# Altium PCB out_board.PcbDoc
Units mm, origin at the board's own origin, x right, y up, seen from the top; angles counter-clockwise.
Board outline 148.2 x 182.42 mm, 2 copper layers (Top Layer, Bottom Layer); 63 components, 124 nets, 454 pads, 33 vias.
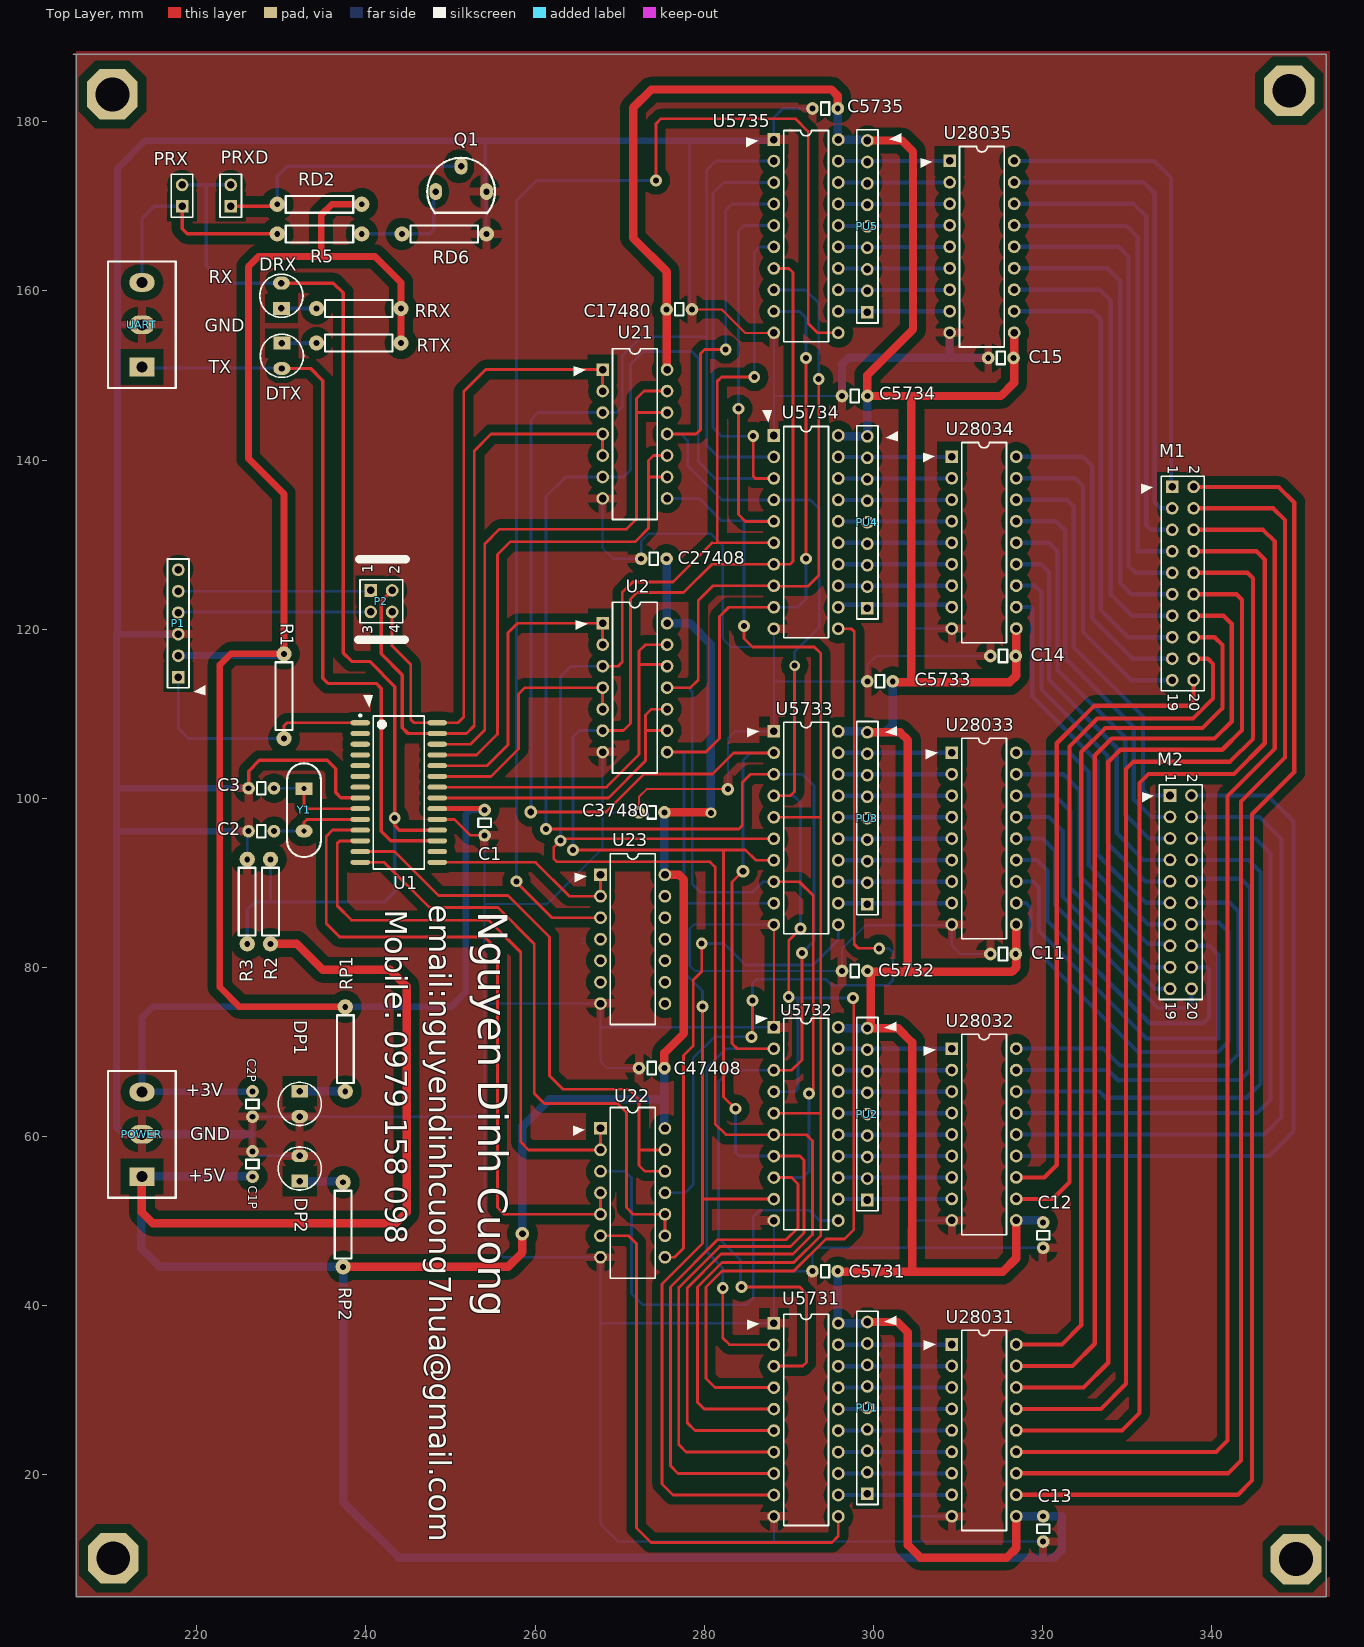
[diagram p0: Top Layer view]
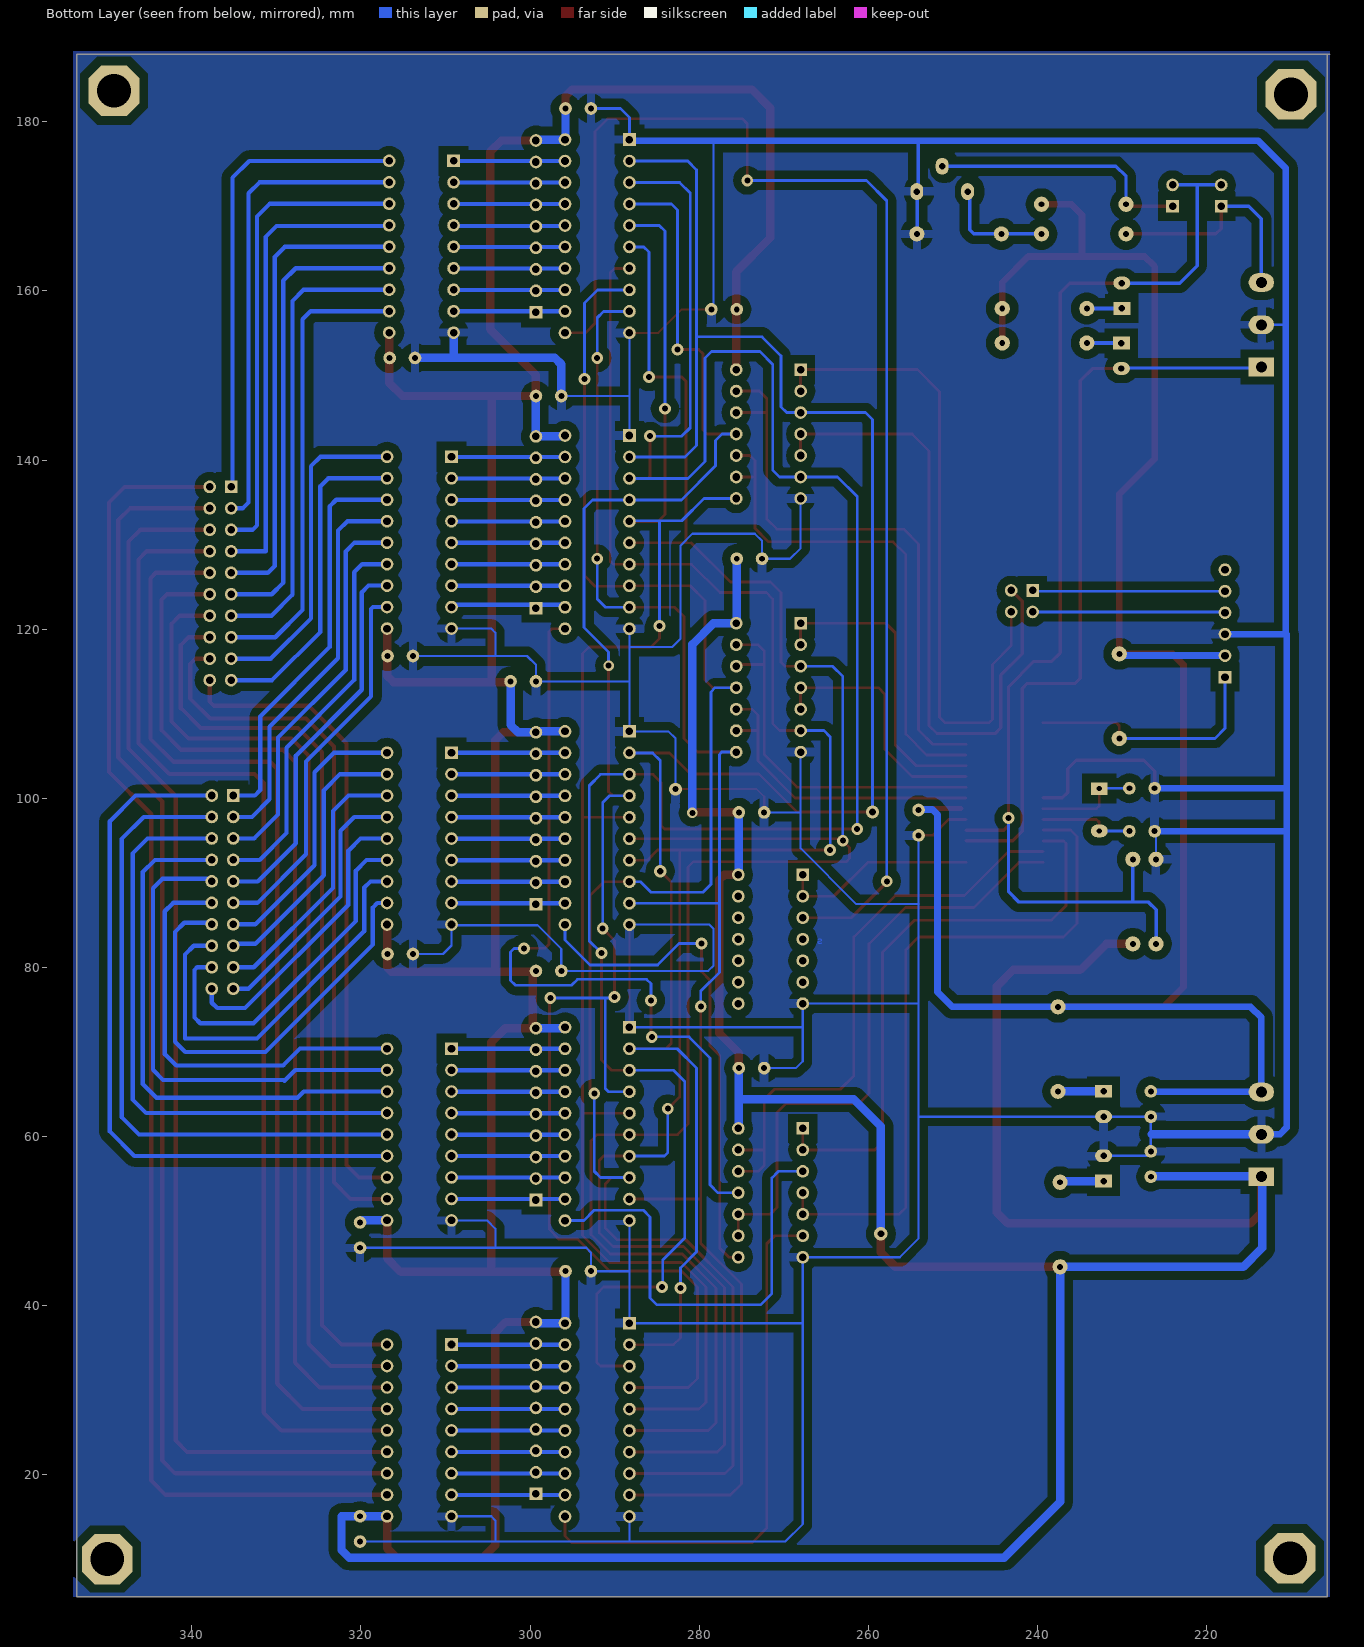
[diagram p1: Bottom Layer view, seen from below]

## Layer stack, top to bottom
Top Layer: signal copper 0.0356
Dielectric: dielectric 0.32, FR-4, Dk 4.8
Bottom Layer: signal copper 0.0356

## Board outline
205.4,188 353.6,188 353.6,5.575 205.7,5.575 205.7,188

## Design rules (kind name [scope] priority, off if disabled: settings)
Clearance [All] p1: gap=1
FabricationTestPointUsage TestPointUsage [All] p1: valid=0 allowmultiple=FALSE
FabricationTestpoint Testpoint [All] p1: side=3 testpointundercomponent=TRUE minsize=1.016 maxsize=2.54 preferedsize=1.524 minholesize=0 maxholesize=1.016 preferedholesize=0.813 testpointgrid=0.025 allowsidetop=TRUE allowsidebottom=TRUE usegrid=TRUE gridtolerance=0
HoleSize [All] p1: absolutevalues=TRUE maxlimit=2.54 minlimit=0.8 maxpercent=80.000 minpercent=20.000
PlaneClearance [All] p1: clearance=1
PlaneConnect [All] p1: planeconnectstyle=Relief reliefexpansion=1 reliefentries=4 reliefconductorwidth=1 reliefairgap=1
PolygonConnect [All] p1: connectstyle=Relief reliefconductorwidth=1 reliefentries=4 polygonreliefangle="90 Angle"
RoutingVias [All] p1: holewidth=0.8 width=1.33 viastyle="Through Hole" minholewidth=0.8 minwidth=1.3 maxholewidth=0.8 maxwidth=2
SilkscreenOverComponentPads [All] p1: minsilkscreentomaskgap=0.254
SolderMaskExpansion [All] p1: expansion=1
Width [All] p1: maxlimit=0.4 minlimit=0.4 preferedwidth=0.4
22 further rules are at their usual default settings.

## Components (designator, comment, footprint, x,y, rotation, side; value= is the part's Value field where it differs from the comment)
C1 "Cap" tu_gom 254.036,96.607 r270 top
C1P "Cap" tu_gom 226.573,57.231 r90 top
C2 "Cap2" tu_gom 227.112,96.099 r180 top
C2P "Cap" tu_gom 226.573,63.327 r270 top
C3 "Cap2" tu_gom 227.112,101.179 r180 top
C11 "Cap" tu_gom 314.85,81.575 r180 top
C12 "Cap" tu_gom 320.1,47.825 r270 top
C13 "Cap" tu_gom 320.1,13.075 r270 top
C14 "Cap" tu_gom 314.85,116.825 r180 top
C15 "Cap" tu_gom 314.6,152.075 r180 top
C5731 "Cap" tu_gom 293.8,44.055 r180 top
C5732 "Cap" tu_gom 297.3,79.575 r180 top
C5733 "Cap" tu_gom 300.3,113.825 r180 top
C5734 "Cap" tu_gom 297.3,147.575 r180 top
C5735 "Cap" tu_gom 293.8,181.575 r180 top
C17480 "Cap" tu_gom 277.55,157.825 r0 top
C27408 "Cap" tu_gom 273.55,128.325 r180 top
C37480 "Cap" tu_gom 273.3,98.325 r180 top
C47408 "Cap" tu_gom 273.3,68.075 r180 top
DP1 "LED0" LED_3 232.161,64.343 r270 top
DP2 "LED0" LED_3 232.161,55.707 r90 top
DRX "LED0" LED_3 229.998,158.931 r90 top
DTX "LED0" LED_3 230.05,152.825 r270 top
M1 "Header 10X2" HDR2X10 335.35,136.825 r270 top
M2 "Header 10X2" HDR2X10 335.1,100.325 r270 top
P1 "PICKIT3" HDR1X6 217.8,114.325 r90 top
P2 "Header 2X2" HDR2X2 240.55,124.575 r270 top
POWER "Header 3" HEADER3 213.5,60.25 r90 top
PRX "Header 2" HDR1X2 218.25,170 r90 top (schematic designator PUA2)
PRXD "Header 2" HDR1X2 224,170 r90 top (schematic designator PUA1)
PU1 "Header 9" HDR1X9 299.3,17.725 r90 top
PU2 "Header 9" HDR1X9 299.3,52.475 r90 top
PU3 "Header 9" HDR1X9 299.3,87.475 r90 top
PU4 "Header 9" HDR1X9 299.3,122.475 r90 top
PU5 "Header 9" HDR1X9 299.3,157.475 r90 top
Q1 "C1815" C1815 250.75,172.25 r0 top
R1 "Res3" R_Nor 230.3,112.075 r90 top
R2 "330R" R_Nor 228.7,87.775 r270 top
R3 "220R" R_Nor 225.95,87.775 r270 top
R5 "Res3" R_Nor 234.5,166.75 r0 top
RD2 "Res3" R_Nor 234.5,170.25 r180 top
RD6 "Res3" R_Nor 249.25,166.75 r180 top
RP1 "Res3" R_Nor 237.55,70.325 r270 top
RP2 "Res3" R_Nor 237.3,49.575 r90 top (schematic designator Rp2)
RRX "Res3" R_Nor 239.142,157.915 r180 top
RTX "Res3" R_Nor 239.142,153.851 r180 top
U1 "PIC18F26K20" SOIC300-28_N 243.876,100.671 r0 top
U2 "74AC08B" DIP14 271.8,113.075 r270 top
U21 "74AC08B" DIP14 271.8,143.075 r270 top
U22 "74AC08B" DIP14 271.55,53.325 r270 top
U23 "74AC08B" DIP14 271.55,83.325 r270 top
U5731 "74ACT573N" N020C 292.05,26.475 r270 top
U5732 "74ACT573N" N020C 292.05,61.475 r270 top
U5733 "74ACT573N" N020C 292.05,96.475 r270 top
U5734 "74ACT573N" N020C 292.05,131.475 r270 top
U5735 "74ACT573N" N020C 292.05,166.475 r270 top
U28031 "ULN2803A" DIP18 313.1,25.225 r270 top
U28032 "ULN2803A" DIP18 313.1,60.225 r270 top
U28033 "ULN2803A" DIP18 313.1,95.225 r270 top
U28034 "ULN2803A" DIP18 313.1,130.225 r270 top
U28035 "ULN2803A" DIP18 312.85,165.225 r270 top
UART "Header 3" HEADER3 213.5,156 r90 top
Y1 "8MHz" Xtal12M 230.668,98.131 r270 top

## Footprints (in the part's own frame and the unit in brackets; to place one, negate y for a bottom-side part, rotate by r counter-clockwise, add the part's x,y. Pads: shape width x height; smd on the part's side, far side on the other; paste and mask are expansions set on the pad)
C1815 [mm]
  oval 1.524x2 hole 0.762: 1(3.5,-0.5) 2(0.5,2.5) 3(-2.5,-0.5)
  silkscreen extent -3.5,-3.06 4.5,3.5
DIP14 [mm] "DIP; 14 Leads; Row Spacing 7.62 mm; Pitch 2.54 mm"
  rect 1.5x1.5 hole 0.9: 1(-7.62,-3.81)
  round 1.5 hole 0.9: 2(-5.08,-3.81) 3(-2.54,-3.81) 4(0,-3.81) 5(2.54,-3.81) 6(5.08,-3.81) 7(7.62,-3.81) 8(7.62,3.81) 9(5.08,3.81) 10(2.54,3.81) 11(0,3.81) 12(-2.54,3.81) 13(-5.08,3.81) 14(-7.62,3.81)
  silkscreen extent -10.1,-2.65 10.1,2.65
DIP18 [mm] "DIP; 18 Leads; Row Spacing 7.62 mm; Pitch 2.54 mm"
  rect 1.5x1.5 hole 0.9: 1(-10.16,-3.81)
  round 1.5 hole 0.9: 2(-7.62,-3.81) 3(-5.08,-3.81) 4(-2.54,-3.81) 5(0,-3.81) 6(2.54,-3.81) 7(5.08,-3.81) 8(7.62,-3.81) 9(10.16,-3.81) 10(10.16,3.81) 11(7.62,3.81) 12(5.08,3.81) 13(2.54,3.81) 14(0,3.81) 15(-2.54,3.81) 16(-5.08,3.81) 17(-7.62,3.81) 18(-10.16,3.81)
  silkscreen extent -11.85,-2.65 11.85,2.65
HDR1X2 [mm] "Connector; Header; 2 Position"
  rect 1.5x1.5 hole 0.9: 1(0,0)
  round 1.5 hole 0.9: 2(2.54,0)
  silkscreen extent -1.27,-1.27 3.81,1.27
HDR1X6 [mm] "Connector; Header; 6 Position"
  rect 1.5x1.5 hole 0.9: 1(0,0)
  round 1.5 hole 0.9: 2(2.54,0) 3(5.08,0) 4(7.62,0) 5(10.16,0) 6(12.7,0)
  silkscreen extent -1.27,-1.27 13.97,1.27
HDR1X9 [mm] "Connector; Header; 9 Position"
  rect 1.5x1.5 hole 0.9: 1(0,0)
  round 1.5 hole 0.9: 2(2.54,0) 3(5.08,0) 4(7.62,0) 5(10.16,0) 6(12.7,0) 7(15.24,0) 8(17.78,0) 9(20.32,0)
  silkscreen extent -1.27,-1.27 21.59,1.27
HDR2X2 [mm] "Connector; Header; 2x2 Position"
  rect 1.5x1.5 hole 0.9: 1(0,0)
  round 1.5 hole 0.9: 2(0,2.54) 3(2.54,0) 4(2.54,2.54)
  silkscreen extent -1.27,-1.27 3.81,3.81
HDR2X10 [mm] "Connector; Header; 10x2 Position"
  rect 1.5x1.5 hole 0.9: 1(0,0)
  round 1.5 hole 0.9: 2(0,2.54) 3(2.54,0) 4(2.54,2.54) 5(5.08,0) 6(5.08,2.54) 7(7.62,0) 8(7.62,2.54) 9(10.16,0) 10(10.16,2.54) 11(12.7,0) 12(12.7,2.54) 13(15.24,0) 14(15.24,2.54) 15(17.78,0) 16(17.78,2.54) 17(20.32,0) 18(20.32,2.54) 19(22.86,0) 20(22.86,2.54)
  silkscreen extent -1.27,-1.27 24.13,3.81
HEADER3 [mm]
  rect 2.2x3 hole 1.3: 1(-5,0)
  oval 2.2x3 hole 1.3: 2(0,0) 3(5,0)
  silkscreen extent -7.5,-4 7.5,4
LED_3 [mm]
  rect 1.524x2 hole 0.762: 1(-1,0)
  oval 1.524x2 hole 0.762: 2(2,0)
  silkscreen extent -2.05,-2.55 3.05,2.55
N020C [mm] "DIP; 20 Leads; Row Spacing 7.62 mm; Pitch 2.54 mm"
  rect 1.5x1.5 hole 0.9: 1(-11.43,-3.81)
  round 1.5 hole 0.9: 2(-8.89,-3.81) 3(-6.35,-3.81) 4(-3.81,-3.81) 5(-1.27,-3.81) 6(1.27,-3.81) 7(3.81,-3.81) 8(6.35,-3.81) 9(8.89,-3.81) 10(11.43,-3.81) 11(11.43,3.81) 12(8.89,3.81) 13(6.35,3.81) 14(3.81,3.81) 15(1.27,3.81) 16(-1.27,3.81) 17(-3.81,3.81) 18(-6.35,3.81) 19(-8.89,3.81) 20(-11.43,3.81)
  silkscreen extent -12.5,-2.65 12.5,2.65
R_Nor [mm]
  round 1.8 hole 0.7: 1(-5,0) 2(5,0)
  silkscreen extent -4,-1 4,1
SOIC300-28_N [mm] "SOIC, 28-Leads, Body 17.9x7.5mm, Pitch 1.27mm, IPC Medium Density"
  oval 2.3x0.6 smd: 1(-4.55,8.255) 2(-4.55,6.985) 3(-4.55,5.715) 4(-4.55,4.445) 5(-4.55,3.175) 6(-4.55,1.905) 7(-4.55,0.635) 8(-4.55,-0.635) 9(-4.55,-1.905) 10(-4.55,-3.175) 11(-4.55,-4.445) 12(-4.55,-5.715) 13(-4.55,-6.985) 14(-4.55,-8.255) 15(4.55,-8.255) 16(4.55,-6.985) 17(4.55,-5.715) 18(4.55,-4.445) 19(4.55,-3.175) 20(4.55,-1.905) 21(4.55,-0.635) 22(4.55,0.635) 23(4.55,1.905) 24(4.55,3.175) 25(4.55,4.445) 26(4.55,5.715) 27(4.55,6.985) 28(4.55,8.255)
  silkscreen extent -4.67,-9.05 3,9.23, body extent -3.8,-9.06 3.8,9.06, height 2.65
tu_gom [mm]
  round 1.5 hole 0.7: 1(-2,0) 2(1,0)
  silkscreen extent -1,-0.75 0,0.75
Xtal12M [mm]
  rect 1.5x2 hole 0.6: 1(-3,2)
  oval 1.5x2 hole 0.6: 2(2,2)
  silkscreen extent -6,0 5.1,4

## Part data
C1 C1P C2 C2P C3 C11 C12 C13 C14 C15 C5731 C5732 C5733 C5734 C5735 C17480 C27408 C37480 C47408: "Capacitor"
DP1 DP2 DRX DTX: "Typical INFRARED GaAs LED"
M1 M2: "Header, 10-Pin, Dual row"
P1: library part "Header 6", "Header, 6-Pin"
P2: "Header, 2-Pin, Dual row"
POWER UART: "Header, 3-Pin"
PRX PRXD: "Header, 2-Pin"
PU1 PU2 PU3 PU4 PU5: "Header, 9-Pin"
R1 R5 RD2 RD6 RP1 RP2 RRX RTX: "Resistor"
R2 R3: library part Res
U1: library part PIC18F242-E/SO, "High Performance, Enhanced FLASH Microcontroller with 10-Bit A/D, 16K FLASH, 28-Pin SOIC, Standard Volt Range, Extended Temperature"
U2 U21 U22 U23: "Quad 2-Input AND Gate"
U5731 U5732 U5733 U5734 U5735: "Octal D-Type Transparent Latch with 3-State Outputs"
U28031 U28032 U28033 U28034 U28035: "Eight Darlington Array"
Y1: library part XTAL, "Crystal Oscillator"

## Free pads (board coordinates)
  oct 6x6 hole 4: 0(349.2,183.675) 1(210,183.25) 2(210.1,10.1) 3(350,10)

## Via types
v1: diameter 1.4, hole 0.711, Top Layer to Bottom Layer, 27 vias
v2: diameter 1.27, hole 0.711, Top Layer to Bottom Layer, 2 vias
v3: diameter 1.5, hole 0.8, Top Layer to Bottom Layer, 2 vias
v4: diameter 1.6, hole 0.8, Top Layer to Bottom Layer, 1 vias
v5: diameter 1.5, hole 0.711, Top Layer to Bottom Layer, 1 vias

## Nets (pads, with @x,y where several pads share a name; then routed paths per layer and width w, separated by ;. In a path a pad name is that pad's centre, name@x,y a point inside that pad or via, vN(x,y) a via of type N, cw(c..) or ccw(c..) an arc to the next point about the centre after c; other vN are vias at no path point)
+3V: C1.1 C2P.1 P1.2 POWER.3 R1.2 RD2.1 RP1.1 RRX.1 RTX.1 U1.20 | length 249.4
  Top Layer w0.254: C1.1@253.877,98.766 C1.1
  Top Layer w0.6: U1.20@249,98.766 C1.1@253.877,98.766
  Top Layer w0.8: RP1.1 225.05,75.325 222.7,77.675 222.7,115.775 224,117.075 R1.2 230.3,135.975 226.1,140.175 226.1,162.875 227.3,164.075 234.7,164.075 ; RD2.1 235.95,170.25 234.7,169 234.7,164.075 ; RTX.1 244.142,161.008 241.075,164.075 234.7,164.075
  Bottom Layer w0.254: C2P.1@226.521,65.275 C2P.1 ; R1.2@230.09,116.865 R1.2 ; C1.1@253.968,98.675 C1.1
  Bottom Layer w0.8: P1.2 R1.2@230.09,116.865 ; C2P.1@226.521,65.275 213.5,65.275 213.5,74.05 214.775,75.325 250.05,75.325 251.8,77.075 251.8,98.075 252.4,98.675 C1.1@253.968,98.675
GND: C1.2 C1P.2 C2.2 C2P.2 C3.2 C11.2 C12.2 C13.2 C14.2 C15.2 C5731.2 C5732.2 C5733.2 C5734.2 C5735.2 C17480.2 C27408.2 C37480.2 C47408.2 DP1.2 DP2.2 P1.3 POWER.2 Q1.1 R3.1 RD6.1 U1.8 U1.19 U2.7 U21.7 U22.7 U23.7 U5731.1 U5731.10 U5732.1 U5732.10 U5733.1 U5733.10 U5734.1 U5734.10 U5735.1 U5735.10 U28031.9 U28032.9 U28033.9 U28034.9 U28035.9 UART.2 | length 905.4
  Top Layer w0.254: C37480.2 272.3,100.175 273.2,101.075 v5(282.8,101.075) ; C17480.2 282.05,157.825 284.83,155.045 U5735.10 ; U5732.1 U5733.10
  Top Layer w0.33: U1.19 250.479,97.496 252.368,95.607 C1.2
  Top Layer w0.4: C3.2 226.112,103.187 227.4,104.475 235.4,104.475 236.4,103.475 236.4,100.675 237.039,100.036 U1.8
  Bottom Layer w0.254: 210.675,156 UART.2 ; R3.1 C2.2@225.95,96.099 ; C2.2@225.95,96.099 225.95,96.2 C2.2@226,96.15 ; 226.469,60.279 226.573,60.175 ; DP2.2 227.097,57.707 C1P.2 226.573,60.175 ; DP1.2 DP1.2@232.161,62.327 ; 254,87.475 254.036,87.475 ; C1.2 254.036,87.475 ; 254.106,75.705 U23.7 267.74,72.875 ; U2.7 267.99,98.325 ; U21.7 267.99,129.585 269.25,128.325 C27408.2 272.55,130.425 273.4,131.275 280.8,131.275 282.2,129.875 282.2,118.875 283.2,117.875 288.24,117.875 ; C47408.2 268.55,68.075 267.74,68.885 267.74,72.875 ; C37480.2 267.99,98.325 ; 278.3,177.775 278.3,157.825 C17480.2 ; v5(282.8,101.075) 282.8,107.075 283.63,107.905 U5733.1 288.24,117.875 ; 288.24,12.135 U5731.10 ; U5732.10 288.24,44.055 ; U5732.1 267.77,72.905 267.74,72.875 ; U5733.10 278.77,85.045 278.3,84.575 278.3,80.175 278.9,79.575 C5732.2 296.3,82.175 299.1,84.975 309.29,84.975 309.29,82.585 310.3,81.575 C11.2 ; U5734.10 288.24,117.875 ; U5734.1 288.24,147.675 ; U5735.10 288.24,147.675 ; 288.29,113.825 C5733.2 299.3,115.775 300.35,116.825 304.1,116.825 ; C5734.2 288.34,147.575 288.24,147.675 ; U28031.9 304.59,15.065 304.1,14.575 304.1,12.075 ; U28032.9 305.09,50.065 304.1,49.075 304.1,46.825 ; U28034.9 304.59,120.065 304.1,119.575 304.1,116.825 ; C14.2@314.3,116.825 C14.2 304.1,116.825 ; C13.2 304.1,12.075 ; C12.2 304.1,46.825 ; 226.573,60.175 C2P.2 DP1.2@232.161,62.327 ; DP1.2@232.161,62.327 254.036,62.327 ; 254.036,62.327 254.036,47.939 256.27,45.705 U22.7 267.74,37.905 ; 254.036,62.327 254.036,87.475 ; 254.036,87.475 261.4,87.475 267.99,94.065 267.99,98.325 ; 267.74,37.905 U5731.1 288.24,44.055 ; 267.74,37.905 267.74,14.135 269.8,12.075 304.1,12.075 ; 288.24,44.055 C5731.2 292.8,46.275 293.35,46.825 304.1,46.825
  Bottom Layer w0.33: U5735.1 288.24,180.515 289.3,181.575 C5735.2
  Bottom Layer w0.4: 254.1,177.775 254.1,171.825 254.2,171.725 254.2,166.75 RD6.1@254.2,166.675
  Bottom Layer w0.8: POWER.2 211.3,60.25 210.5,61.05 210.5,96.099 ; P1.3 210.6,119.405 ; C2.2 225.95,96.099 210.5,96.099 ; C3.2 210.5,101.179 ; U5735.1@288.24,177.775 278.3,177.775 254.1,177.775 213.875,177.775 210.6,174.5 210.6,119.405 ; 210.5,96.099 210.5,101.179 ; 210.5,101.179 210.5,119.405 210.6,119.405
  Bottom Layer w1: POWER.2@213.5,60.279 226.469,60.279 ; C5734.2 296.3,151.325 297.05,152.075 309.04,152.075 ; U28035.9 309.04,152.075 ; C15.2 309.04,152.075
LE1: U22.6 U5731.11 | length 65.5
  Top Layer w0.33: U22.6 271.055,48.245 272,47.3 272,13.675 273.7,11.975 295.1,11.975 295.86,12.735 U5731.11
LE2: U22.3 U5732.11 | length 53.4
  Bottom Layer w0.33: U22.3 270.635,55.865 271.4,55.1 271.4,41.425 272.75,40.075 285,40.075 285.8,40.875 285.8,50.475 286.6,51.275 292.4,51.275 293.63,50.045 U5732.11
LE3: U22.8 U5733.11 | length 59.8
  Top Layer w0.33: U22.8 276.48,45.705 277.551,46.776 277.551,69.551 278.7,70.7 278.7,78.475 279.71,79.485 v1(279.71,82.809)
  Bottom Layer w0.33: v1(279.71,82.809) 282.366,82.809 284.9,80.275 292.9,80.275 295.86,83.235 U5733.11
LE4: U22.11 U5734.11 | length 97.4
  Top Layer w0.33: v1@285.7,71.875 v1(285.7,76.075) ; U5734.11 297.4,120.045 297.744,119.701 297.744,82.731 298.225,82.25 v1@300.6,82.25
  Bottom Layer w0.33: U22.11 277.75,53.325 278.7,54.275 278.7,69.275 281.2,71.775 v1(285.6,71.775) ; v1(285.7,76.075) 285.7,78.075 286.2,78.575 294.4,78.575 295.1,77.875 301.725,77.875 302.3,78.45 302.3,81.8 301.875,82.225 v1(300.7,82.225)
LE5: U23.3 U5735.11 | length 162.1
  Top Layer w0.254: v1@257.7,90.175 v1@257.75,90.125
  Top Layer w0.33: v1@257.75,90.125 262.01,85.865 U23.3 ; v1(274.3,173.075) 274.3,179.775 274.9,180.375 290.775,180.375 292.3,178.85 292.3,156.175 293.43,155.045 U5735.11
  Bottom Layer w0.33: v1(257.8,90.175) 257.8,170.675 260.2,173.075 v1(274.3,173.075)
LVP: P1.6
MCLR: P1.1 R1.1 U1.1 | length 29.7
  Top Layer w0.33: R1.1 230.3,108.575 230.651,108.926 U1.1
  Bottom Layer w0.33: P1.1 217.8,108.275 219,107.075 R1.1
NetC2_1: C2.1 U1.10 Y1.2 | length 11.4
  Top Layer w0.33: Y1.2 232.668,97.164 233,97.496 U1.10
  Bottom Layer w0.254: C2.1 C2.1@229.144,96.131
  Bottom Layer w0.33: C2.1@229.144,96.131 Y1.2
NetC3_1: C3.1 U1.9 Y1.1 | length 12.4
  Top Layer w0.254: Y1.1@232.62,101.179 Y1.1
  Top Layer w0.33: Y1.1 232.668,99.098 233,98.766 U1.9
  Bottom Layer w0.33: C3.1 Y1.1@232.62,101.179
NetDP1_1: DP1.1 RP1.2 | length 5.4
  Bottom Layer w0.254: RP1.2@237.532,65.343 RP1.2
  Bottom Layer w1: DP1.1 RP1.2@237.532,65.343
NetDP2_1: DP2.1 RP2.2 | length 5.2
  Bottom Layer w0.254: RP2.2@237.168,54.707 RP2.2
  Bottom Layer w1: DP2.1 RP2.2@237.168,54.707
NetDRX_1: DRX.1 RRX.2 | length 4.2
  Bottom Layer w0.254: RRX.2@234.126,157.931 RRX.2
  Bottom Layer w0.5: DRX.1 RRX.2@234.126,157.931
NetDTX_1: DTX.1 RTX.2 | length 4.1
  Bottom Layer w0.254: DTX.1 DTX.1@230.05,153.835 ; RTX.2@234.126,153.835 RTX.2
  Bottom Layer w0.5: DTX.1@230.05,153.835 RTX.2@234.126,153.835
NetPU1_1: PU1.1 U5731.12 U28031.8 | length 13.5
  Bottom Layer w0.254: U28031.8@309.27,17.585 U28031.8
  Bottom Layer w0.5: U5731.12 299.3,17.585 309.27,17.585 U28031.8@309.29,17.585
NetPU1_2: PU1.2 U5731.13 U28031.7 | length 13.5
  Bottom Layer w0.254: U28031.7@309.27,20.125 U28031.7
  Bottom Layer w0.5: U5731.13 299.3,20.125 309.27,20.125 U28031.7@309.29,20.125
NetPU1_3: PU1.3 U5731.14 U28031.6 | length 13.5
  Bottom Layer w0.254: U28031.6@309.27,22.665 U28031.6
  Bottom Layer w0.5: U5731.14 299.3,22.665 309.27,22.665 U28031.6@309.29,22.665
NetPU1_4: PU1.4 U5731.15 U28031.5 | length 13.5
  Bottom Layer w0.254: U28031.5@309.27,25.205 U28031.5
  Bottom Layer w0.5: U5731.15 299.3,25.205 309.27,25.205 U28031.5@309.29,25.205
NetPU1_5: PU1.5 U5731.16 U28031.4 | length 13.7
  Bottom Layer w0.254: U28031.4 309.29,27.745 U28031.4@309.57,27.745
  Bottom Layer w0.5: U5731.16 299.3,27.745 U28031.4@309.29,27.745
NetPU1_6: PU1.6 U5731.17 U28031.3 | length 13.5
  Bottom Layer w0.254: U28031.3@309.27,30.285 U28031.3
  Bottom Layer w0.5: U5731.17 299.3,30.285 309.27,30.285 U28031.3@309.29,30.285
NetPU1_7: PU1.7 U5731.18 U28031.2 | length 13.5
  Bottom Layer w0.254: U28031.2@309.27,32.825 U28031.2
  Bottom Layer w0.5: U5731.18 299.3,32.825 309.27,32.825 U28031.2@309.29,32.825
NetPU1_8: PU1.8 U5731.19 U28031.1 | length 13.5
  Bottom Layer w0.254: U28031.1@309.27,35.365 U28031.1
  Bottom Layer w0.5: U5731.19 299.3,35.365 309.27,35.365 U28031.1@309.29,35.365
NetPU2_1: PU2.1 U5732.12 U28032.8 | length 13.5
  Bottom Layer w0.254: U28032.8@309.27,52.585 U28032.8
  Bottom Layer w0.5: U5732.12 299.3,52.585 309.27,52.585 U28032.8@309.29,52.585
NetPU2_2: PU2.2 U5732.13 U28032.7 | length 13.5
  Bottom Layer w0.254: U28032.7@309.27,55.125 U28032.7
  Bottom Layer w0.5: U5732.13 299.3,55.125 309.27,55.125 U28032.7@309.29,55.125
NetPU2_3: PU2.3 U5732.14 U28032.6 | length 13.5
  Bottom Layer w0.254: U28032.6@309.27,57.665 U28032.6
  Bottom Layer w0.5: U5732.14 299.3,57.665 309.27,57.665 U28032.6@309.29,57.665
NetPU2_4: PU2.4 U5732.15 U28032.5 | length 13.5
  Bottom Layer w0.254: U28032.5@309.27,60.205 U28032.5
  Bottom Layer w0.5: U5732.15 299.3,60.205 309.27,60.205 U28032.5@309.29,60.205
NetPU2_5: PU2.5 U5732.16 U28032.4 | length 13.5
  Bottom Layer w0.254: U28032.4@309.27,62.745 U28032.4
  Bottom Layer w0.5: U5732.16 299.3,62.745 309.27,62.745 U28032.4@309.29,62.745
NetPU2_6: PU2.6 U5732.17 U28032.3 | length 13.5
  Bottom Layer w0.254: U28032.3@309.27,65.285 U28032.3
  Bottom Layer w0.5: U5732.17 299.3,65.285 309.27,65.285 U28032.3@309.29,65.285
NetPU2_7: PU2.7 U5732.18 U28032.2 | length 13.5
  Bottom Layer w0.254: U28032.2@309.27,67.825 U28032.2
  Bottom Layer w0.5: U5732.18 299.3,67.825 309.27,67.825 U28032.2@309.29,67.825
NetPU2_8: PU2.8 U5732.19 U28032.1 | length 13.5
  Bottom Layer w0.254: U28032.1@309.27,70.365 U28032.1
  Bottom Layer w0.5: U5732.19 299.3,70.365 309.27,70.365 U28032.1@309.29,70.365
NetPU3_1: PU3.1 U5733.12 U28033.8 | length 13.5
  Bottom Layer w0.254: U28033.8@309.27,87.585 U28033.8
  Bottom Layer w0.5: U5733.12 299.3,87.585 U28033.8@309.29,87.585
NetPU3_2: PU3.2 U5733.13 U28033.7 | length 13.5
  Bottom Layer w0.254: U28033.7@309.27,90.125 U28033.7
  Bottom Layer w0.5: U5733.13 299.3,90.125 U28033.7@309.29,90.125
NetPU3_3: PU3.3 U5733.14 U28033.6 | length 13.4
  Bottom Layer w0.5: U5733.14 299.3,92.665 U28033.6@309.29,92.665
NetPU3_4: PU3.4 U5733.15 U28033.5 | length 13.5
  Bottom Layer w0.254: U28033.5@309.27,95.205 U28033.5
  Bottom Layer w0.5: U5733.15 299.3,95.205 U28033.5@309.29,95.205
NetPU3_5: PU3.5 U5733.16 U28033.4 | length 13.5
  Bottom Layer w0.254: U28033.4@309.27,97.745 U28033.4
  Bottom Layer w0.5: U5733.16 299.3,97.745 U28033.4@309.29,97.745
NetPU3_6: PU3.6 U5733.17 U28033.3 | length 13.5
  Bottom Layer w0.254: U28033.3@309.27,100.285 U28033.3
  Bottom Layer w0.5: U5733.17 299.3,100.285 U28033.3@309.29,100.285
NetPU3_7: PU3.7 U5733.18 U28033.2 | length 13.5
  Bottom Layer w0.254: U28033.2@309.27,102.825 U28033.2
  Bottom Layer w0.5: U5733.18 299.3,102.825 U28033.2@309.29,102.825
NetPU3_8: PU3.8 U5733.19 U28033.1 | length 13.5
  Bottom Layer w0.254: U28033.1@309.27,105.365 U28033.1
  Bottom Layer w0.5: U5733.19 299.3,105.365 U28033.1@309.29,105.365
NetPU4_1: PU4.1 U5734.12 U28034.8 | length 13.3
  Bottom Layer w0.5: U5734.12@296,122.875 299.3,122.875 U28034.8@309.29,122.875
NetPU4_2: PU4.2 U5734.13 U28034.7 | length 13.5
  Bottom Layer w0.254: U28034.7@309.27,125.125 U28034.7
  Bottom Layer w0.5: U5734.13 299.3,125.125 309.27,125.125 U28034.7@309.29,125.125
NetPU4_3: PU4.3 U5734.14 U28034.6 | length 13.5
  Bottom Layer w0.254: U28034.6@309.27,127.665 U28034.6
  Bottom Layer w0.5: U5734.14 299.3,127.665 309.27,127.665 U28034.6@309.29,127.665
NetPU4_4: PU4.4 U5734.15 U28034.5 | length 13.5
  Bottom Layer w0.254: U28034.5@309.27,130.205 U28034.5
  Bottom Layer w0.5: U5734.15 299.3,130.205 309.27,130.205 U28034.5@309.29,130.205
NetPU4_5: PU4.5 U5734.16 U28034.4 | length 13.5
  Bottom Layer w0.254: U28034.4@309.27,132.745 U28034.4
  Bottom Layer w0.5: U5734.16 299.3,132.745 309.27,132.745 U28034.4@309.29,132.745
NetPU4_6: PU4.6 U5734.17 U28034.3 | length 13.5
  Bottom Layer w0.254: U28034.3@309.27,135.285 U28034.3
  Bottom Layer w0.5: U5734.17 299.3,135.285 309.27,135.285 U28034.3@309.29,135.285
NetPU4_7: PU4.7 U5734.18 U28034.2 | length 13.5
  Bottom Layer w0.254: U28034.2@309.27,137.825 U28034.2
  Bottom Layer w0.5: U5734.18 299.3,137.825 309.27,137.825 U28034.2@309.29,137.825
NetPU4_8: PU4.8 U5734.19 U28034.1 | length 13.5
  Bottom Layer w0.254: U28034.1@309.27,140.365 U28034.1
  Bottom Layer w0.5: U5734.19 299.3,140.365 309.27,140.365 U28034.1@309.29,140.365
NetPU5_1: PU5.1 U5735.12 U28035.8 | length 13.2
  Bottom Layer w0.254: U28035.8@309.02,157.585 U28035.8
  Bottom Layer w0.5: U5735.12 299.3,157.585 U28035.8@309.04,157.585
NetPU5_2: PU5.2 U5735.13 U28035.7 | length 13.2
  Bottom Layer w0.254: U28035.7@309.02,160.125 U28035.7
  Bottom Layer w0.5: U5735.13 299.3,160.125 U28035.7@309.04,160.125
NetPU5_3: PU5.3 U5735.14 U28035.6 | length 13.2
  Bottom Layer w0.254: U28035.6@309.02,162.665 U28035.6
  Bottom Layer w0.5: U5735.14 299.3,162.665 U28035.6@309.04,162.665
NetPU5_4: PU5.4 U5735.15 U28035.5 | length 13.2
  Bottom Layer w0.254: U28035.5@309.02,165.205 U28035.5
  Bottom Layer w0.5: U5735.15 299.3,165.205 U28035.5@309.04,165.205
NetPU5_5: PU5.5 U5735.16 U28035.4 | length 13.4
  Bottom Layer w0.254: U5735.16@295.6,167.675 U5735.16@295.86,167.675
  Bottom Layer w0.5: U5735.16@295.86,167.675 299.3,167.675 U28035.4@309.04,167.675
NetPU5_6: PU5.6 U5735.17 U28035.3 | length 13.2
  Bottom Layer w0.254: U28035.3@309.02,170.285 U28035.3
  Bottom Layer w0.5: U5735.17 299.3,170.285 U28035.3@309.04,170.285
NetPU5_7: PU5.7 U5735.18 U28035.2 | length 13.2
  Bottom Layer w0.254: U28035.2@309.02,172.825 U28035.2
  Bottom Layer w0.5: U5735.18 299.3,172.825 U28035.2@309.04,172.825
NetPU5_8: PU5.8 U5735.19 U28035.1 | length 13.2
  Bottom Layer w0.254: U28035.1@309.02,175.365 U28035.1
  Bottom Layer w0.5: U5735.19 299.3,175.365 309.02,175.365 U28035.1@309.04,175.365
NetQ1_3: Q1.3 R5.2 RD6.2 | length 13.2
  Bottom Layer w0.4: R5.2 RD6.2 247.525,166.75 248,167.225 Q1.3@248,171.75
NetU1_11: U1.11 U22.4 U22.5 | length 81.7
  Top Layer w0.33: U1.11 236.051,96.226 235.3,95.475 235.3,85.175 236.9,83.575 254.05,83.575 255.55,82.075 255.55,51.575 256.34,50.785 U22.5 U22.4
NetU1_12: U1.12 U22.1 U22.2 | length 69
  Top Layer w0.33: U1.12 236.881,94.956 236.6,94.675 236.6,87.275 238.3,85.575 254.5,85.575 258.3,81.775 258.3,59.325 259.22,58.405 263.8,58.405 U22.2 U22.1
NetU1_13: U1.13 U22.12 U22.13 | length 68.9
  Top Layer w0.33: U1.13 243.389,93.686 248.592,88.483 256.792,88.483 261.7,83.575 261.7,67.175 263.3,65.575 271.1,65.575 272.3,64.375 272.3,56.575 273.01,55.865 U22.12 ; 272.38,58.405 U22.13
NetU1_14: U1.14 U22.9 U22.10 | length 72.8
  Top Layer w0.33: U1.14 242.159,92.416 247.5,87.075 255.6,87.075 259.9,82.775 259.9,65.075 261.087,63.888 269.738,63.888 270.8,62.825 270.8,51.575 271.59,50.785 U22.10 U22.9
NetU1_15: U1.15 U23.1 U23.2 | length 23.5
  Top Layer w0.33: U1.15 260.059,92.416 264.07,88.405 U23.2 U23.1
NetU1_21: U1.21 U2.9 U2.10 | length 37.2
  Top Layer w0.33: U1.21 268.661,100.036 273.05,104.425 273.05,109.825 273.76,110.535 U2.10 ; 273.13,107.995 U2.9
NetU1_22: U1.22 U2.12 U2.13 | length 44.6
  Top Layer w0.33: U1.22 268.431,101.306 272.3,105.175 272.3,115.825 ; U2.12@275.55,115.825 272.3,115.825 ; U2.13 273.05,118.155 272.3,117.405 272.3,115.825
NetU1_23: U1.23 U2.4 U2.5 | length 30.3
  Top Layer w0.33: U1.23 254.801,102.576 258.05,105.825 258.05,112.325 258.8,113.075 U2.4 U2.5
NetU1_24: U1.24 U2.1 U2.2 | length 36.8
  Top Layer w0.33: U1.24 254.321,103.846 256.8,106.325 256.8,119.575 257.92,120.695 U2.1 U2.2
NetU1_25: U1.25 U21.9 U21.10 | length 61.2
  Top Layer w0.33: U1.25 253.091,105.116 255.55,107.575 255.55,128.825 257.05,130.325 271.8,130.325 273.4,131.925 273.4,139.925 274.01,140.535 U21.10 ; 273.4,138 U21.9
NetU1_26: U1.26 U21.12 U21.13 | length 69.3
  Top Layer w0.33: U1.26 252.361,106.386 254.05,108.075 254.05,130.075 255.8,131.825 270.8,131.825 272,133.025 272,147.275 272.88,148.155 U21.13 ; 272,145.615 U21.12
OUT1: U21.3 U5731.2 U5732.2 U5733.2 U5734.2 U5735.2 | length 247.1
  Top Layer w0.33: v3(259.5,98.375) 268.4,98.375 272.9,102.875 281,102.875 283.49,105.365 U5733.2 ; v1(282.2,42.075) 282.2,36.175 283.01,35.365 U5731.2 ; v3(284.6,91.375) 283.3,90.075 283.3,70.975 283.91,70.365 U5732.2
  Bottom Layer w0.33: v3(259.5,98.375) 259.5,144.775 260.34,145.615 269.63,145.615 270.3,146.285 270.3,152.325 272.55,154.575 280.3,154.575 ; v1(282.2,42.075) 282.2,44.455 280.3,46.355 280.3,68.075 282.59,70.365 U5732.2 ; v3(284.6,91.375) 284.6,104.475 285.49,105.365 U5733.2 ; U5734.2 281.66,140.365 280.3,141.725 280.3,174.325 281.34,175.365 U5735.2
OUT2: U21.6 U5731.3 U5732.3 U5733.3 U5734.3 U5735.3 | length 269.5
  Top Layer w0.33: v1(261.3,96.375) 284.1,96.375 284.5,96.775 284.5,101.875 285.45,102.825 U5733.3 ; v1(284.4,42.175) 291.3,42.175 292.1,41.375 292.1,33.275 291.65,32.825 U5731.3 ; v1(285.8,142.825) 285.8,138.075 286.05,137.825 U5734.3 ; U5732.3 290.35,67.825 291.558,69.033 v1(291.558,81.675)
  Bottom Layer w0.254: v1@284.3,42.175 v1(284.4,42.175)
  Bottom Layer w0.33: v1(261.3,96.375) 261.3,135.675 263.62,137.995 270.47,137.995 271.3,138.825 271.3,151.325 272.8,152.825 278.55,152.825 279.3,152.075 279.3,139.825 281.3,137.825 U5734.3 ; v1@284.3,42.175 284.3,45.375 281.7,47.975 281.7,66.475 283.05,67.825 U5732.3 ; v1(285.8,142.825) 282.05,142.825 281.05,143.825 281.05,171.575 282.3,172.825 U5735.3 ; U5733.3 291.65,102.825 293,101.475 293,83.117 v1(291.558,81.675)
OUT3: U21.11 U5731.4 U5732.4 U5733.4 U5734.4 U5735.4 | length 215
  Top Layer w0.254: v1(297.6,76.375) v1@297.7,76.075
  Top Layer w0.33: U21.11 279.05,143.075 279.55,143.575 279.55,152.575 280.05,153.075 v1(282.55,153.075) ; U5731.4 281.29,30.285 280.2,31.375 280.2,42.175 282.1,44.075 290.6,44.075 294.4,47.875 296.6,47.875 297.7,48.975 v1@297.7,76.075 ; U5733.4 290.21,100.285 290.7,100.775 v2(290.7,115.675) ; v1(290,76.5) 290.008,83.183 v1(291.4,84.575)
  Bottom Layer w0.33: U21.11 277.3,143.075 278.05,142.325 278.05,139.325 282.09,135.285 292.59,135.285 293.6,134.275 293.6,120.175 290.7,117.275 v2(290.7,115.675) ; v1(282.55,153.075) 282.55,169.575 283.26,170.285 U5735.4 ; U5732.4 290.71,65.285 291.1,65.675 291.1,76.3 ; U5733.4 290.59,100.285 291.4,99.475 v1(291.4,84.575) ; v1@289.9,76.375 v1(297.6,76.375)
OUT4: U21.8 U5731.5 U5732.5 U5733.5 U5734.5 U5735.5 | length 200.1
  Top Layer w0.33: v1(284.05,146.075) 284.05,133.55 284.855,132.745 U5734.5 ; v1(284.7,120.375) 284.7,118.875 285.7,117.875 293.025,117.875 293.8,117.1 293.8,48.275 290.6,45.075 282.1,45.075 279.2,42.175 279.2,28.55 280.005,27.745 U5731.5 ; U5732.5 293.8,62.745 ; U5733.5 293.8,97.745
  Bottom Layer w0.254: U5734.5@288.16,132.825 U5734.5
  Bottom Layer w0.33: U21.8 279.42,135.455 282.05,132.825 U5734.5@288.16,132.825 ; v1(284.05,146.075) 284.05,167.075 284.72,167.745 U5735.5 ; v1(284.7,120.375) 284.7,132.825
OUT5: U2.3 U5731.6 U5732.6 U5733.6 U5734.6 U5735.6 | length 242.1
  Top Layer w0.254: 280.93,130.205 281.55,130.205
  Top Layer w0.33: v1(263,94.975) 262.2,94.175 262.2,92.875 262.6,92.475 280.7,92.475 281.3,91.875 281.3,61.475 282.57,60.205 292.07,60.205 292.8,59.475 292.8,48.375 290.5,46.075 282,46.075 278,42.075 278,26.125 278.92,25.205 U5731.6 ; v1@263,95.205 U5733.6 ; U2.3 269.84,115.615 270.3,116.075 270.3,124.325 271.55,125.575 276.3,125.575 280.93,130.205 ; v1(285.93,149.825) 282.05,149.825 281.55,149.325 281.55,130.205 U5734.6
  Bottom Layer w0.33: v1(263,94.975) 263,114.375 264.24,115.615 U2.3 ; v1(285.93,149.825) 285.93,164.585 286.55,165.205 U5735.6
OUT6: U2.6 U5731.7 U5732.7 U5733.7 U5734.7 U5735.7 | length 218.6
  Top Layer w0.33: v1(264.5,93.875) 284.9,93.875 286.11,92.665 U5733.7 ; U2.6 270.47,107.995 271.3,108.825 271.3,123.575 272.05,124.325 277.55,124.325 280.89,127.665 290.14,127.665 290.51,128.035 290.51,162.165 290.01,162.665 U5735.7 ; 282.3,93.875 282.3,64.675 v1(283.7,63.275) ; U5731.7 277.86,22.665 277,23.525 277,42.125 281.85,46.975 290.2,46.975 291.8,48.575 291.8,57.175 291.31,57.665 U5732.7
  Bottom Layer w0.254: U5732.7@288.23,57.675 U5732.7
  Bottom Layer w0.33: v1(264.5,93.875) 264.5,107.275 265.22,107.995 U2.6 ; v1(283.7,63.275) 283.7,58.075 284.1,57.675 U5732.7@288.23,57.675
OUT7: U2.11 U5731.8 U5732.8 U5733.8 U5734.8 U5735.8 | length 206.4
  Top Layer w0.254: U5734.8 U5734.8@288.29,125.075
  Top Layer w0.33: U2.11 278.4,113.075 279.3,113.975 279.3,123.375 281.05,125.125 U5734.8 ; U5731.8 276.925,20.125 276,21.05 276,42.2 281.575,47.775 289.7,47.775 291.1,49.175 291.1,54.375 290.35,55.125 U5732.8 ; U5733.8 291.25,90.125 292.9,88.475 292.9,65.575 v1(292.4,65.075) ; U5734.8@288.29,125.075 292.3,125.075 293.55,126.325 v1(293.55,149.575)
  Bottom Layer w0.33: U2.11 278.1,113.075 278.6,112.575 278.6,89.825 279.55,88.875 285.7,88.875 286.95,90.125 U5733.8 ; U5732.8 291.65,55.125 292.4,55.875 v1(292.4,65.075) ; U5735.8 292,160.125 293.55,158.575 v1(293.55,149.575)
OUT8: U2.8 U5731.9 U5732.9 U5733.9 U5734.9 U5735.9 | length 193.9
  Top Layer w0.33: U2.8 280.18,105.455 281.8,107.075 281.8,121.475 282.91,122.585 U5734.9 ; v1(279.8,75.375) 279.8,47.35 275,42.55 275,18.9 276.315,17.585 U5731.9 ; 279.81,52.585 U5732.9 ; v1(292.05,128.325) v1(292.05,152.075)
  Bottom Layer w0.33: U2.8 277.32,105.455 277.6,105.175 277.6,79.375 279.8,77.175 v1(279.8,75.375) ; 277.6,87.585 U5733.9 ; U5734.9 291.06,122.585 292.05,123.575 v1(292.05,128.325) ; U5735.9 291.29,157.585 292.05,156.825 v1(292.05,152.075)
PGC: P1.5 P2.1 | length 22.7
  Bottom Layer w0.33: P1.5 P2.1@240.46,124.485
PGC_H: P2.2 U1.27 U21.4 U21.5 | length 78.1
  Top Layer w0.33: U1.27 251.881,107.656 252.8,108.575 252.8,141.075 254.8,143.075 U21.4 U21.5@267.99,140.435
  Top Layer w0.4: P2.2 241.8,123.285 241.8,117.075 244.3,114.575 244.3,108.325 244.969,107.656 U1.27
PGD: P1.4 P2.3 | length 22.7
  Bottom Layer w0.33: P1.4@217.89,122.035 P2.3
PGD_H: P2.4 U1.28 U21.1 U21.2 | length 78.9
  Top Layer w0.33: P2.4 243.09,118.035 245.3,115.825 245.3,109.325 245.699,108.926 250.901,108.926 251.55,109.575 251.55,148.075 254.17,150.695 U21.1 U21.2
RL1: M1.16 U28031.18 | length 106.5
  Top Layer w0.5: U28031.18 322.31,35.385 324.6,37.675 324.6,105.45 327.45,108.3 338.95,108.3 341.3,110.65 341.3,118.125 340.38,119.045 M1.16
RL2: M1.14 U28031.17 | length 114.3
  Top Layer w0.5: U28031.17 323.57,32.845 326.2,35.475 326.2,105.05 328.2,107.05 340.375,107.05 342.4,109.075 342.4,120.625 341.44,121.585 M1.14
RL3: M1.12 U28031.16 | length 121.9
  Top Layer w0.5: U28031.16 324.88,30.305 327.8,33.225 327.8,104.3 329.225,105.725 341.275,105.725 343.6,108.05 343.6,123.475 342.95,124.125 M1.12
RL4: M1.10 U28031.15 | length 129.7
  Top Layer w0.5: U28031.15 326.915,27.765 329.9,30.75 329.9,103.45 330.775,104.325 342.2,104.325 344.9,107.025 344.9,126.025 344.26,126.665 M1.10
RL5: M1.8 U28031.14 | length 137.3
  Top Layer w0.5: U28031.14 329.425,25.225 331.5,27.3 331.5,101.8 332.575,102.875 342.675,102.875 346.3,106.5 346.3,128.25 345.345,129.205 M1.8
RL6: M1.6 U28031.13 | length 144.4
  Top Layer w0.5: U28031.13 340.56,22.685 341.9,24.025 341.9,100.275 347.5,105.875 347.5,130.35 346.105,131.745 M1.6
RL7: M1.4 U28031.12 | length 152
  Top Layer w0.5: U28031.12 341.97,20.145 343.5,21.675 343.5,99.6 348.7,104.8 348.7,132.9 347.315,134.285 M1.4
RL8: M1.2 U28031.11 | length 159
  Top Layer w0.5: U28031.11 343.105,17.605 344.8,19.3 344.8,98.1 349.8,103.1 349.8,134.975 347.95,136.825 M1.2
RL9: M2.12 U28032.18 | length 50.6
  Bottom Layer w0.5: U28032.18 327.19,70.385 329.2,68.375 341.85,68.375 343.2,69.725 343.2,86.625 342.2,87.625 M2.12
RL10: M2.10 U28032.17 | length 57.8
  Bottom Layer w0.254: M2.10 M2.10@337.95,90.475
  Bottom Layer w0.5: U28032.17 327.77,67.845 329.04,66.575 329.14,66.675 343.4,66.675 344.6,67.875 344.6,89.35 343.475,90.475 M2.10@337.95,90.475
RL11: M2.8 U28032.16 | length 63.7
  Bottom Layer w0.5: U28032.16 326.77,65.305 327.5,64.575 344.175,64.575 345.8,66.2 345.8,91.275 344.37,92.705 M2.8
RL12: M2.6 U28032.15 | length 70
  Bottom Layer w0.5: U28032.15 345.4,62.765 347,64.365 347,93.475 345.23,95.245 M2.6
RL13: M2.4 U28032.14 | length 76.9
  Bottom Layer w0.5: U28032.14 346.25,60.225 348.3,62.275 348.3,95.175 345.69,97.785 M2.4
RL14: M2.2 U28032.13 | length 84
  Bottom Layer w0.5: U28032.13 346.81,57.685 349.7,60.575 349.7,97.275 346.65,100.325 M2.2
RL15: M1.20 U28032.12 | length 76
  Top Layer w0.5: U28032.12 320.22,55.145 321.7,56.625 321.7,106.5 326.125,110.925 337.375,110.925 337.89,111.44 M1.20
RL16: M1.18 U28032.11 | length 84.7
  Top Layer w0.5: U28032.11 321.23,52.605 323.2,54.575 323.2,106.125 326.5,109.425 337.825,109.425 340.2,111.8 340.2,115.875 339.57,116.505 M1.18
RL17: M2.13 U28033.18 | length 33
  Bottom Layer w0.5: U28033.18 323.19,105.385 325.5,103.075 325.5,92.075 332.49,85.085 M2.13
RL18: M2.15 U28033.17 | length 32.5
  Bottom Layer w0.254: M2.15@334.87,82.775 M2.15
  Bottom Layer w0.5: U28033.17 322.47,102.845 324.4,100.915 324.4,90.875 332.5,82.775 M2.15@334.87,82.775
RL19: M2.17 U28033.16 | length 31.9
  Bottom Layer w0.5: U28033.16 321.47,100.305 323.3,98.475 323.3,89.375 332.67,80.005 M2.17
RL20: M2.19 U28033.15 | length 31.2
  Bottom Layer w0.5: U28033.15 320.79,97.765 321.8,96.755 322.4,96.155 322.4,88.375 333.31,77.465 M2.19
RL21: M2.20 U28033.14 | length 34.7
  Bottom Layer w0.5: U28033.14 320.05,95.225 321.5,93.775 321.5,87.375 333.7,75.175 337,75.175 337.64,75.815 M2.20
RL22: M2.18 U28033.13 | length 42.4
  Bottom Layer w0.5: U28033.13 319.34,92.685 320.6,91.425 320.6,85.475 332.7,73.375 339,73.375 339.7,74.075 339.7,79.675 339.37,80.005 M2.18
RL23: M2.16 U28033.12 | length 48.1
  Bottom Layer w0.5: U28033.12 318.88,90.145 319.6,89.425 319.6,84.275 332.3,71.575 340.8,71.575 340.8,81.525 339.78,82.545 M2.16
RL24: M2.14 U28033.11 | length 53.3
  Bottom Layer w0.254: M2.14 M2.14@337.83,85.275
  Bottom Layer w0.5: U28033.11 318.07,87.605 318.592,87.083 318.592,82.683 331.3,69.975 340.775,69.975 342,71.2 342,84.175 340.9,85.275 M2.14@337.83,85.275
RL25: M1.17 U28034.18 | length 38.9
  Bottom Layer w0.5: U28034.18 324.79,140.385 325.9,139.275 325.9,121.275 330.67,116.505 M1.17
RL26: M1.19 U28034.17 | length 38.4
  Bottom Layer w0.5: U28034.17 323.855,137.845 324.8,136.9 324.8,119.675 330.51,113.965 M1.19
RL27: M2.1 U28034.16 | length 47.5
  Bottom Layer w0.5: U28034.16 322.92,135.305 323.7,134.525 323.7,117.875 331.9,109.675 331.9,100.975 332.55,100.325 M2.1
RL28: M2.3 U28034.15 | length 46.5
  Bottom Layer w0.5: U28034.15 321.585,132.765 322.7,131.65 322.7,116.55 330.8,108.45 330.8,99.875 332.89,97.785 M2.3
RL29: M2.5 U28034.14 | length 46.2
  Bottom Layer w0.5: U28034.14 320.75,130.225 321.8,129.175 321.8,115.175 329.8,107.175 329.8,98.075 332.63,95.245 M2.5
RL30: M2.7 U28034.13 | length 46.1
  Bottom Layer w0.5: U28034.13 319.84,127.685 320.8,126.725 320.8,113.975 328.8,105.975 328.8,95.875 331.97,92.705 M2.7
RL31: M2.9 U28034.12 | length 45.5
  Bottom Layer w0.5: U28034.12 319.105,125.145 319.9,124.35 319.9,112.825 327.7,105.025 327.7,94.675 332.21,90.165 M2.9
RL32: M2.11 U28034.11 | length 45.2
  Bottom Layer w0.5: U28034.11 318.57,122.605 318.8,122.375 318.8,112.05 326.5,104.35 326.5,93.375 332.25,87.625 M2.11
RL33: M1.1 U28035.18 | length 55.9
  Bottom Layer w0.5: U28035.18 333.215,175.385 335.2,173.4 M1.1@335.2,136.825
RL34: M1.3 U28035.17 | length 56.1
  Bottom Layer w0.5: U28035.17 332.005,172.845 333.3,171.55 333.3,134.975 333.99,134.285 M1.3
RL35: M1.5 U28035.16 | length 56.1
  Bottom Layer w0.5: U28035.16 330.795,170.305 332.3,168.8 332.3,132.275 332.83,131.745 M1.5
RL36: M1.7 U28035.15 | length 56.4
  Bottom Layer w0.254: U28035.15 U28035.15@316.75,167.675
  Bottom Layer w0.5: U28035.15@316.75,167.675 329.975,167.675 331.27,166.38 331.27,129.205 M1.7
RL37: M1.9 U28035.14 | length 56.1
  Bottom Layer w0.5: U28035.14 329,165.225 330.2,164.025 330.2,127.475 331.01,126.665 M1.9
RL38: M1.11 U28035.13 | length 55.6
  Bottom Layer w0.5: U28035.13 327.715,162.685 329.2,161.2 329.2,125.475 330.55,124.125 M1.11
RL39: M1.13 U28035.12 | length 55
  Bottom Layer w0.5: U28035.12 322.63,160.145 326.78,160.145 328.1,158.825 328.1,124.075 330.59,121.585 M1.13
RL40: M1.15 U28035.11 | length 54.8
  Bottom Layer w0.5: U28035.11 325.945,157.605 326.9,156.65 326.9,122.275 330.13,119.045 M1.15
RX: DRX.2 PRX.2 PRXD.2 R2.1 R3.2 U1.18 | length 141
  Top Layer w0.4: DRX.2 236.144,160.931 237.3,159.775 237.3,117.175 238.3,116.175 240.425,116.175 243.4,113.2 v1(243.4,97.65) 243.4,96.777 243.951,96.226 U1.18
  Bottom Layer w0.254: DRX.2@229.95,160.883 DRX.2
  Bottom Layer w0.4: PRX.2 221.1,172.54 ; PRXD.2 221.1,172.54 ; R3.2 225.95,86.8 226.875,87.725 228.7,87.725 ; R2.1 228.7,87.725 ; DRX.2 223.169,160.931 221.1,163 221.1,172.54 ; v1(243.4,97.65) 243.4,88.925 242.2,87.725 230,87.725 228.7,87.725
RX1: PRXD.1 Q1.2 RD2.2 | length 30.9
  Top Layer w0.4: PRXD.1 RD2.2@229.25,170
  Bottom Layer w0.4: RD2.2@229.25,170 RD2.2 229.5,173.55 230.7,174.75 Q1.2@251,174.75
RX_D: PRX.1 R5.1 UART.3 | length 27.2
  Top Layer w0.4: PRX.1 218.25,167.375 218.875,166.75 R5.1
  Bottom Layer w0.4: UART.3 213.5,168.525 214.975,170 PRX.1 ; R5.1 R5.1@229.7,166.75
TX: DTX.2 U1.17 UART.1 | length 88
  Top Layer w0.4: DTX.2 233.45,150.825 234.9,149.375 234.9,114.175 235.5,113.575 241.2,113.575 241.8,112.975 241.8,96.075 242.919,94.956 U1.17
  Bottom Layer w0.254: DTX.2@229.442,150.883 DTX.2@229.49,150.835
  Bottom Layer w0.4: UART.1@213.5,150.883 DTX.2@229.442,150.883
VCC: C1P.1 C11.1 C12.1 C13.1 C14.1 C15.1 C5731.1 C5732.1 C5733.1 C5734.1 C5735.1 C17480.1 C27408.1 C37480.1 C47408.1 POWER.1 PU1.9 PU2.9 PU3.9 PU4.9 PU5.9 R2.2 RP2.1 U2.14 U21.14 U22.14 U23.14 U5731.20 U5732.20 U5733.20 U5734.20 U5735.20 U28031.10 U28032.10 U28033.10 U28034.10 U28035.10 | length 775.1
  Top Layer w0.254: C5731.1 C5731.1@295.88,43.975
  Top Layer w1: POWER.1 213.5,51 214.8,49.7 243.5,49.7 244.8,51 244.8,77.75 242.85,79.7 234.9,79.7 231.825,82.775 R2.2 ; RP2.1 256.8,44.575 258.5,46.275 v4(258.5,48.475) ; C47408.1 275.3,69.875 277.6,72.175 277.6,90.375 277.03,90.945 U23.14 ; C37480.1 v2@280.75,98.325 ; U21.14@275.6,151.005 275.6,157.825 275.6,162.275 271.6,166.275 271.6,181.675 273.75,183.825 295.05,183.825 295.8,183.075 C5735.1 ; C5731.1@295.88,43.975 304.6,43.975 ; PU1.9 302.88,38.045 304.1,36.825 304.1,11.65 305.575,10.175 315.8,10.175 316.91,11.285 U28031.10 ; PU2.9 PU2.9@299.7,72.795 ; C5732.1@299.3,79.475 316.4,79.475 316.91,79.985 316.91,81.575 U28033.10 ; PU5.9 303.38,177.795 304.7,176.475 304.7,155.45 299.3,150.05 C5734.1 299.7,147.575 304.5,147.575 ; PU3.9@299.419,107.792 303.183,107.792 304.1,106.875 304.1,79.55 ; C5732.1@299.7,79.475 PU2.9@299.7,72.795 ; C5733.1@302.3,113.725 304.5,113.725 ; U28035.10 316.66,152.075 316.66,149.135 315.1,147.575 304.5,147.575 ; U28032.10 316.91,45.585 315.3,43.975 304.6,43.975 ; U28034.10 316.91,116.825 316.91,114.485 316.15,113.725 304.5,113.725 ; PU2.9@299.7,72.795 302.93,72.795 304.6,71.125 304.6,43.975 ; 304.5,113.725 304.5,147.575
  Bottom Layer w0.254: C1P.1@226.525,55.279 C1P.1 ; U22.14@275.3,61.005 U22.14 ; U23.14@275.3,91.005 U23.14 ; U2.14@275.55,120.755 U2.14 ; U5731.20@295.8,37.965 U5731.20 ; U5734.20@295.8,142.965 U5734.20 U5734.20@295.97,142.795 ; U5735.20@295.8,177.965 U5735.20 ; C13.1@320.09,15.065 C13.1
  Bottom Layer w1: C1P.1@226.525,55.279 213.5,55.279 213.4,55.279 213.4,55.25 213.4,46.8 215.625,44.575 RP2.1 237.3,16.775 243.9,10.175 321.4,10.175 322.3,11.075 322.3,15.075 C13.1 ; v4(258.5,48.475) 258.5,61.175 261.7,64.375 275.3,64.375 ; U22.14@275.3,61.005 275.3,64.375 ; C47408.1 275.3,64.375 ; U23.14@275.3,91.005 C37480.1 ; U2.14@275.55,120.755 C27408.1 ; U2.14 277.98,120.695 278.305,120.695 280.8,118.2 v2(280.8,98.275) ; U5731.20@295.8,37.965 C5731.1 ; U5735.20@295.8,177.965 C5735.1 ; U5731.20 PU1.9@299.16,37.905 ; U5732.20@295.86,72.795 PU2.9 ; U5733.20 PU3.9@299.19,107.905 ; U5735.20 PU5.9@299.19,177.905 ; U5734.20@295.97,142.795 PU4.9 C5734.1 ; PU3.9 301.42,107.795 302.3,108.675 C5733.1 ; U28031.10 C13.1@320.09,15.065 ; U28032.10 C12.1@319.86,50.065
pads on no net: U1.2 U1.3 U1.4 U1.5 U1.6 U1.7 U1.16 U23.4 U23.5 U23.6 U23.8 U23.9 U23.10 U23.11 U23.12 U23.13

## Polygon pours and split planes (outlines as drawn)
GND on Top Layer "Top Layer-GND" (solid, pour order 1000): 205.7,188.325 354,188.325 354,5.575 205.7,5.575
GND on Bottom Layer "Bottom Layer-GND" (solid, pour order 1001): 206.7,188.325 354,188.325 354,5.575 205.4,5.575 205.4,188.325

## Other copper
Bottom Layer:
  text "s" at 265.4,82.45 h1.52

## Silkscreen, mask and mechanical layers (free items; w line width, h text height)
Top Overlay:
  region: 333.2,100.262 331.8,99.537 331.8,100.687
  region: 333.079,136.756 331.679,136.031 331.679,137.181
  region: 307,175.287 305.6,174.562 305.6,175.712
  region: 307.3,140.437 305.9,139.712 305.9,140.862
  region: 307.6,105.362 306.2,104.637 306.2,105.787
  region: 307.4,70.237 306,69.513 306,70.663
  region: 307.4,35.437 306,34.712 306,35.862
  region: 301.3,38.088 302.7,38.813 302.7,37.663
  region: 286.5,37.862 285.1,37.138 285.1,38.288
  region: 287.5,73.987 286.1,73.262 286.1,74.412
  region: 301.3,72.838 302.7,73.563 302.7,72.413
  region: 301.4,107.813 302.8,108.538 302.8,107.388
  region: 286.5,107.912 285.1,107.187 285.1,108.337
  region: 301.9,177.938 303.3,178.663 303.3,177.512
  region: 301.5,142.663 302.9,143.388 302.9,142.238
  region: 287.587,144.475 286.862,145.875 288.012,145.875
  region: 286.4,177.737 285,177.012 285,178.162
  region: 266,150.662 264.6,149.937 264.6,151.087
  region: 266.2,120.637 264.8,119.912 264.8,121.062
  region: 266.1,90.762 264.7,90.037 264.7,91.187
  region: 265.9,60.812 264.5,60.087 264.5,61.238
  region: 240.387,110.775 239.662,112.175 240.812,112.175
  region: 219.6,112.613 221,113.338 221,112.187
  lines w1: 239.1,118.725 244.6,118.725 ; 239.2,128.25 244.7,128.25
  text "RX" at 221.4,160.883 h1.52
  text "GND" at 220.9,155.175 h1.52
  text "TX" at 221.4,150.25 h1.52
  text "email:nguyendinhcuong7hua@gmail.com" at 246.6,87.375 h4.5 r270
  text "Mobile: 0979 158 098" at 241.4,86.825 h4.5 r270
  text "Nguyen Dinh Cuong" at 252.1,86.625 h6 r270
  text "+3V" at 218.7,64.775 h1.52
  text "GND" at 219.2,59.525 h1.52
  text "+5V" at 219,54.625 h1.52
  text "email:nguyendinhcuong7hua@gmail.com" at 259.1,-242.725 h6
Mechanical 1:
  lines w0.254: 96,148.21 96,154.25

## Text inside footprints (layer, text, board x,y; h text height)
M1: Top Overlay "2" at 337.382,139.365 h1.27 r270; Top Overlay "1" at 334.842,139.365 h1.27 r270; Top Overlay "19" at 334.842,112.441 h1.27 r270; Top Overlay "20" at 337.382,112.441 h1.27 r270
M2: Top Overlay "2" at 337.132,102.865 h1.27 r270; Top Overlay "1" at 334.592,102.865 h1.27 r270; Top Overlay "19" at 334.592,75.941 h1.27 r270; Top Overlay "20" at 337.132,75.941 h1.27 r270
P2: Top Overlay "3" at 240.804,119.368 h1.27 r90; Top Overlay "4" at 243.979,119.495 h1.27 r90; Top Overlay "2" at 243.979,126.48 h1.27 r90; Top Overlay "1" at 240.804,126.607 h1.27 r90